# Altium PCB usb_serial_daughter.PcbDoc
Units mm, origin at the board's own origin, x right, y up, seen from the top; angles counter-clockwise.
Board outline 16 x 25 mm, 4 copper layers (Top Copper, Plane Layer 1 (GND), Plane Layer 2 (VCC), Bottom Copper), stack 1.57 mm thick; 10 components, 19 nets, 56 pads, 8 vias.
Unrouted connection lines stored in the file: 6.
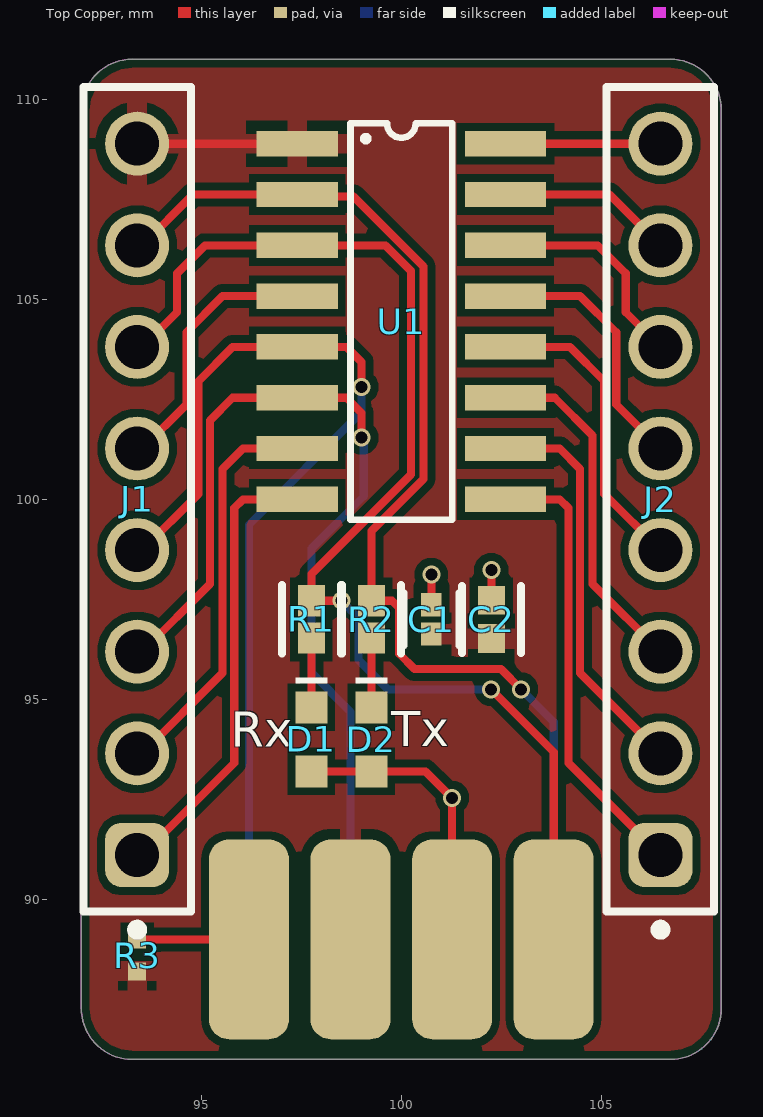
[diagram p0: Top Copper view]
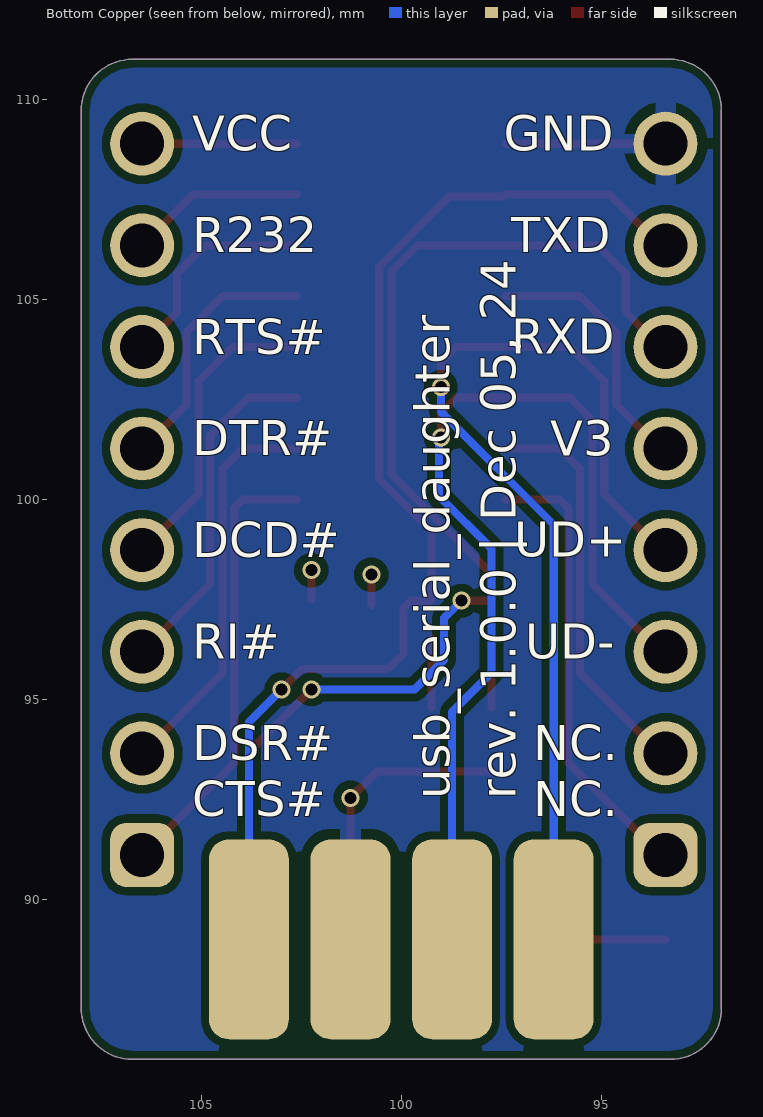
[diagram p1: Bottom Copper view, seen from below]
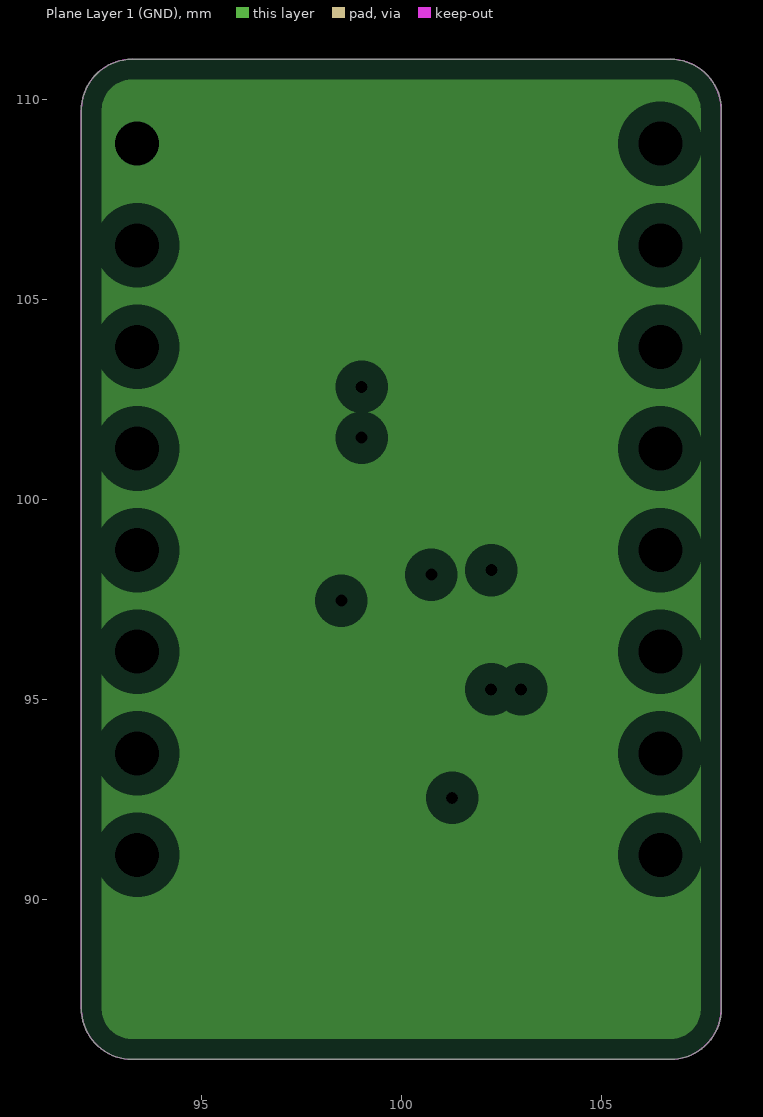
[diagram p2: Plane Layer 1 (GND), clearances drawn from the general rule]
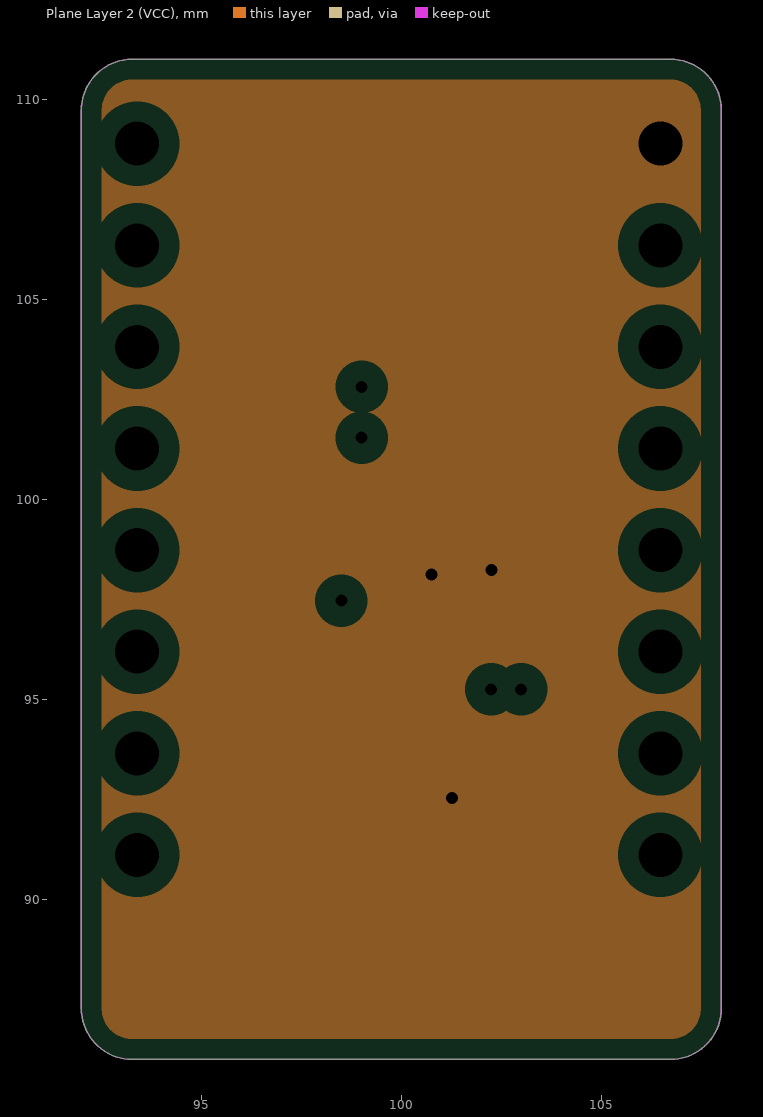
[diagram p3: Plane Layer 2 (VCC), clearances drawn from the general rule]
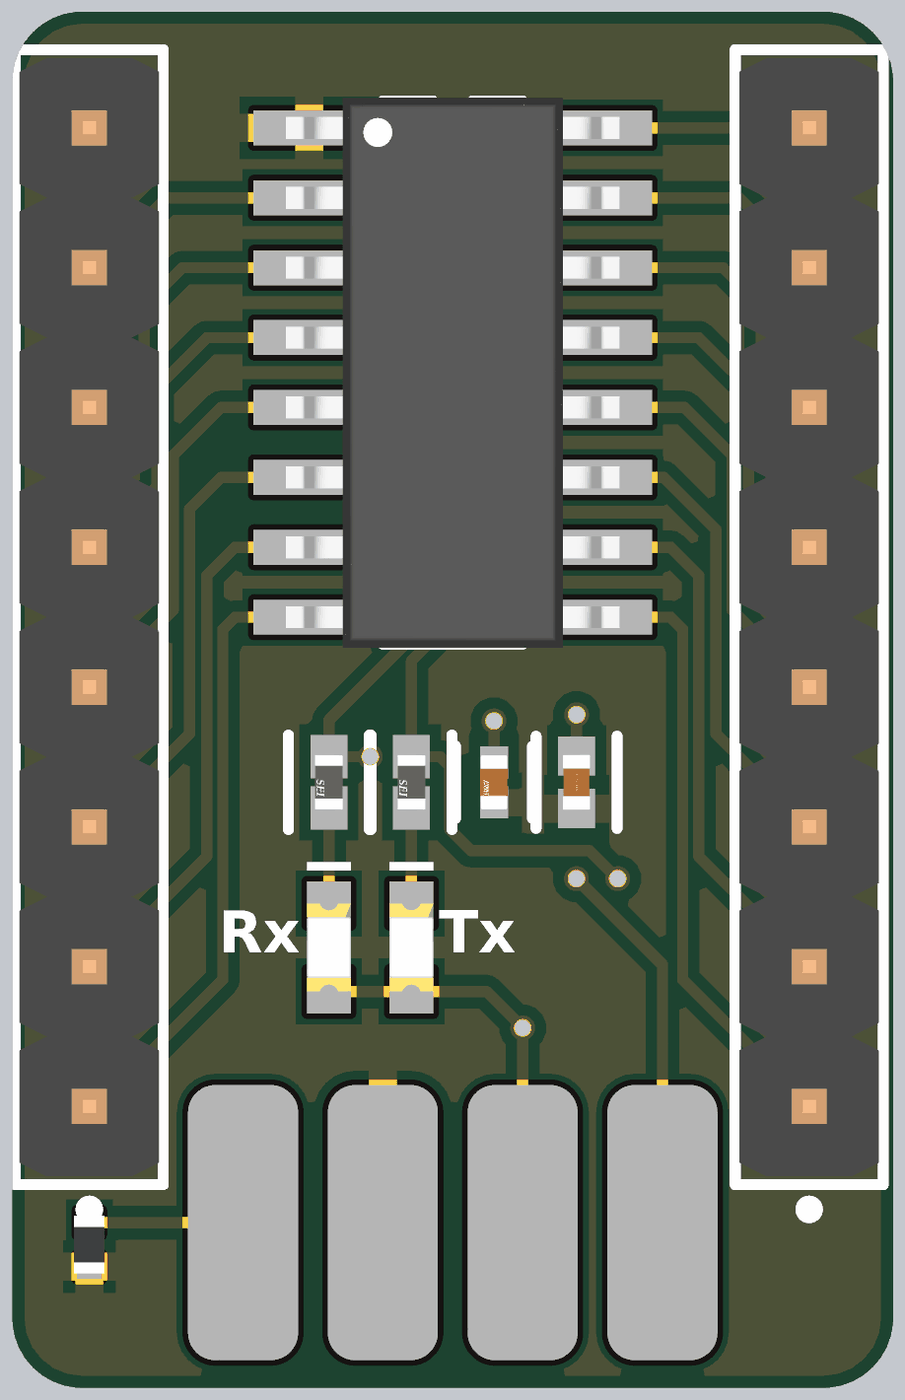
[diagram p4: 3D render of the assembled board from above, using the file's embedded part models]

## Layer stack, top to bottom
Top Mask: solder mask 0.015, Solder Resist, Dk 3.8
Top Copper: signal copper 0.035
Dielectric 1: prepreg 0.2, 7628, Dk 4.6
Plane Layer 1 (GND): plane copper 0.0175, net GND
Core: core 1.065, FR-4, Dk 4.5
Plane Layer 2 (VCC): plane copper 0.0175, net VCC
Dielectric 2: prepreg 0.2, 7628, Dk 4.6
Bottom Copper: signal copper 0.035
Bottom Mask: solder mask 0.015, Solder Resist, Dk 3.8

## Board outline
92,87.27 92,109.73 cw(c93.27,109.73) 93.27,111 106.73,111 cw(c106.73,109.73) 108,109.73 108,87.27 cw(c106.73,87.27) 106.73,86 93.27,86 cw(c93.27,87.27)

## Design rules (kind name [scope] priority, off if disabled: settings)
BoardOutlineClearance [All] p1: gap=0.2 ignorepadtopadclearanceinfootprint=FALSE except(0.4: Arc-SplitBarrior Arc-SplitContinuation Track-SplitBarrior Track-SplitContinuation SMDPad-SplitBarrior SMDPad-SplitContinuation THPad-SplitBarrior THPad-SplitContinuation Via-SplitBarrior Via-SplitContinuation Fill-SplitBarrior Fill-SplitContinuation Poly-SplitBarrior Poly-SplitContinuation Region-SplitBarrior Region-SplitContinuation Text-SplitBarrior Text-SplitContinuation)
Clearance [All] p1: gap=0.2 ignorepadtopadclearanceinfootprint=FALSE except(0.089: Arc-Arc Arc-Track Arc-SMDPad Track-Track Track-SMDPad SMDPad-SMDPad; 0.127: Arc-Via Track-Via SMDPad-Via THPad-Via Via-Via; 0.254: Arc-Text Track-Text SMDPad-Text THPad-Text Via-Text Fill-Text Poly-Text Region-Text Text-Text)
HoleSize [All] p1: absolutevalues=TRUE maxlimit=6.3 minlimit=0.2 maxpercent=80.000 minpercent=20.000
MinimumAnnularRing [All] p1: minimumring=0.076
MinimumSolderMaskSliver [All] p1: minsoldermaskwidth=0.1
PlaneClearance [All] p1: clearance=0.508
PlaneConnect [All] p1: planeconnectstyle=Relief reliefexpansion=0.508 reliefentries=4 reliefconductorwidth=0.254 reliefairgap=0.254
PolygonConnect PolygonConnect_1 [All] p1: thpad.connectstyle=Relief thpad.reliefconductorwidth=0.508 thpad.reliefentries=4 thpad.polygonreliefangle="90 Angle" thpad.airgapwidth=0.254 smdpad.connectstyle=Relief smdpad.reliefconductorwidth=0.508 smdpad.reliefentries=4 smdpad.polygonreliefangle="90 Angle" smdpad.airgapwidth=0.254 via.connectstyle=Direct via.reliefconductorwidth=0.508 via.reliefentries=4 via.polygonreliefangle="90 Angle" via.airgapwidth=0.254
RoutingCorners [All] p1: cornerstyle=Round minsetback=2.54 maxsetback=2.54
RoutingVias [All] p1: holewidth=0.5 width=1 viastyle="Through Hole" minholewidth=0.2 minwidth=0.45 maxholewidth=1 maxwidth=2
SilkToSilkClearance [All] p1: silktosilkclearance=0.1
SilkToSolderMaskClearance [IsPad] p1: minsilkscreentomaskgap=0.1 clearancetoexposedcopper=TRUE
SolderMaskExpansion [All] p1: expansion=0.102 istentingtop=FALSE
Width [All] p1: maxlimit=2.54 minlimit=0.089 preferedwidth=0.381
23 further rules are at their usual default settings.

## Components (designator, comment, footprint, x,y, rotation, side; value= is the part's Value field where it differs from the comment)
C1 "0402ZD104KAT2A" FP-0402-L_1_0_1-W_0_5_0_1-IPC_C 100.75,97 r270 top
C2 "EMK105BJ105KV-F" FP-0402-L_1_0_0_05-W_0_5-IPC_A 102.25,97 r270 top
D1 "150060VS75000" WL-SMCW_0603_150060xx75000 97.75,94 r270 top
D2 "150060RS75000" WL-SMCW_0603_150060xx75000 99.25,94 r270 top
J1 "61300811121" 61300811121 93.396,100 r90 top locked
J2 "61300811121" 61300811121 106.477,100 r90 top locked
R1 "RMCF0402FT1K00" FP-RMCF0402-IPC_A 97.75,97 r270 top
R2 "RMCF0402FT1K00" FP-RMCF0402-IPC_A 99.25,97 r270 top
R3 "ERJ2GE0R00X" RESC1005X40X25LL05T05 93.396,88.6 r90 top locked
U1 "CH340C" CH340C 100,100 r0 top locked

## Footprints (in the part's own frame and the unit in brackets; to place one, negate y for a bottom-side part, rotate by r counter-clockwise, add the part's x,y. Pads: shape width x height; smd on the part's side, far side on the other; paste and mask are expansions set on the pad)
61300811121 [mm] "Pin Header, pitch 2.54 mm, THT, Vertical, single row, 8p"
  rrect50% 1.6x1.6 hole 1.1: 1(-8.89,0)
  round 1.6 hole 1.1: 2(-6.35,0) 3(-3.81,0) 4(-1.27,0) 5(1.27,0) 6(3.81,0) 7(6.35,0) 8(8.89,0)
  silkscreen extent -10.88,-1.35 10.31,1.35, body extent -10.16,-1.27 10.16,1.27, height 8.57
CH340C [mil]
  rect 80x25 smd: 1(-102.5,350) 2(-102.5,300) 3(-102.5,250) 4(-102.5,200) 5(-102.5,150) 6(-102.5,100) 7(-102.5,50) 8(-102.5,0) 8(-102.5,0) 9(102.5,0) 9(102.5,0) 10(102.5,50) 11(102.5,100) 12(102.5,150) 13(102.5,200) 14(102.5,250) 15(102.5,300) 16(102.5,350)
  silkscreen extent -50,-20 50,370, body extent -119,-22 119,372, height 65
FP-0402-L_1_0_0_05-W_0_5-IPC_A [mm]
  rect 0.715x0.672 smd paste+0 mask+0: 1(-0.479,0) 2(0.479,0)
  silkscreen extent -0.84,-0.74 0.84,0.74, body extent -1.04,-0.54 1.04,0.54, height 0.25
FP-0402-L_1_0_1-W_0_5_0_1-IPC_C [mm]
  rect 0.581x0.512 smd paste+0 mask+0: 1(-0.366,0) 2(0.366,0)
  silkscreen extent -0.66,-0.7 0.66,0.7, body extent -0.76,-0.4 0.76,0.4, height 0.25
FP-RMCF0402-IPC_A [mm]
  rect 0.781x0.672 smd paste+0 mask+0: 1(-0.466,0) 2(0.466,0)
  silkscreen extent -0.86,-0.74 0.86,0.74, body extent -1.06,-0.54 1.06,0.54, height 0.25
RESC1005X40X25LL05T05 [mm] "Chip Resistor, 2-Leads, Body 1.05x0.55mm, IPC High Density"
  rect 0.45x0.45 smd: 1(-0.4,0) 2(0.4,0)
  body extent -0.53,-0.28 0.53,0.28, height 0.4
WL-SMCW_0603_150060xx75000 [mm] "SMD Mono-color Chip LED, body 1.60 x 0.80 mm"
  rect 0.8x0.8 smd: 1(-0.8,0) 2(0.8,0)
  silkscreen extent -1.55,-0.4 -1.4,0.4, body extent -0.8,-0.4 0.8,0.4, height 0.7

## Part data
C1: library part CMP-2008-02878-3, "General Purpose Ceramic Capacitor, 0402, 100nF, 10%, X5R, 15%, 10V", Capacitance=100nF, Case Code (Imperial)=0402, Case Code (Metric)=1005, Dielectric=X5R, Insulation Resistance=100GR, Max Operating Temperature=85°C, Min Operating Temperature=-55°C, Package Quantity=1, Tolerance=10%, Voltage=10V, Case/Package=0402, Construction=Flat, Contact Plating=Tin, Depth=0.5mm, Dissipation Factor=5%, Height=0.56mm, Lead Free="Lead Free", Length=1mm, Mount="Surface Mount", Packaging="Tape and Reel", Radiation Hardening=No, REACH SVHC="No SVHC", RoHS Compliant=Yes, Series=-, Termination=SMD/SMT, Thickness=0.022inch, Voltage Rating=10V, Voltage Rating (DC)=10V, Width=0.02inch
C2: library part CMP-14477-000104-2, "None", Capacitance=1uF, Case Code (Imperial)=0402, Case Code (Metric)=1005, Dielectric=X5R, Max Operating Temperature=85°C, Min Operating Temperature=-55°C, Package Quantity=1, Tolerance=10%, Voltage Rating=16V, Case/Package=0402, Construction=Flat, Depth=0.5mm, Halogen Free="Halogen Free", Height=0.5mm, Length=1mm, Mount="Surface Mount", Number of Pins=2, Packaging="Tape and Reel", Radiation Hardening=No, RoHS Compliant=Yes, Series=M, Termination=SMD/SMT, Thickness=0.022inch, Voltage Rating (DC)=16V, Width=0.02inch
D1: library part CMP-1426-00006-7, "WURTH ELEKTRONIK - 150060VS75000 - LED, Green, SMD, 0603, 30 mA, 2 V, 570 nm", Case Code (Imperial)=0603, Case Code (Metric)=1608, Color=Green, Forward Current=100mA, Forward Voltage=2V, Max Junction Temperature (Tj)=95°C, Max Operating Temperature=85°C, Max Reverse Voltage (DC)=5V, Min Operating Temperature=-40°C, Power Dissipation=72mW, Test Current=20mA, Case/Package=0603, Dominant Wavelength=570nm, Height=700µm, Length=1.6mm, Lens Style="Clear, Rectangular", Luminous Intensity=40mcd, Mount="Surface Mount", Number of Pins=2, Packaging="Tape and Reel", Peak Wavelength=572nm, REACH SVHC=Unknown, Reverse Voltage=5V, RoHS=Compliant, Viewing Angle=140°, Wavelength=570nm, Width=800µm
D2: library part CMP-1426-00001-4, "LED Low-Power Uni-Color Red 630nm 2V 2-Pin Chip 0603(1608Metric) T/R", Case Code (Imperial)=0603, Case Code (Metric)=1608, Color=Red, Forward Current=100mA, Forward Voltage=2V, Max Junction Temperature (Tj)=95°C, Max Operating Temperature=85°C, Max Reverse Voltage (DC)=5V, Min Operating Temperature=-40°C, Power Dissipation=72mW, Test Current=20mA, Case/Package=0603, Dominant Wavelength=625nm, Height=700µm, Length=1.6mm, Lens Style="Clear, Rectangular", Luminous Intensity=250mcd, Mount="Surface Mount", Packaging="Tape and Reel", Peak Wavelength=630nm, REACH SVHC=Unknown, Reverse Voltage=5V, RoHS=Compliant, Viewing Angle=140°, Wavelength=625nm, Width=800µm
J1 J2: library part CMP-1502-01076-3, Color=Black, Contact Resistance=20mΩ, Current Rating=3A, Max Operating Temperature=105°C, Min Operating Temperature=-40°C, Operating Supply Voltage=250V, Connector Type="Male Pin", Contact Material=Copper, Contact Mating Length=5.9944mm, Contact Plating=Gold, Gender=Male, Height=8.54mm, Lead Pitch=2.54mm, Mount="Through Hole", NexarPartId=32855533, Number of Contacts=8, Number of Pins=8, Number of Positions=8, Number of Rows=1, Orientation=Vertical, Packaging=Bulk, Pitch=2.54mm, REACH SVHC=Unknown, RoHS=Compliant, Termination=Solder, Voltage Rating=250V
R1 R2: library part CMP-26527-000026-1, "1kΩ ±1% 0.063W 0402 Thick Film Chip Resistor AEC-Q200 compliant", Case Code (Imperial)=0402, Case Code (Metric)=1005, Max Operating Temperature=155°C, Max Power Dissipation=63mW, Min Operating Temperature=-55°C, Resistance=1kR, Resistor Type="Thick Film", Temperature Coefficient=100ppm/°C, Tolerance=1%, Case/Package=0402, Construction=Rectangular, Contact Plating=Tin, Depth=0.5mm, Features="Automotive AEC-Q200", Height=0.016inch, Lead Free="Lead Free", Length=1mm, Military Standard=Not, Mount="Surface Mount", Number of Terminations=2, Packaging="Tape and Reel", Power Rating=63mW, Radiation Hardening=No, RoHS Compliant=Yes, Series=RMCF, Size Code=0402, Width=0.02inch
R3: library part CMP-2000-07451-1, "Chip Resistor, 0 Ohm, 0.1 W, -55 to 155 degC, 0402 (1005 Metric), RoHS, Tape and Reel", Case Code (Imperial)=0402, Case Code (Metric)=1005, Manufacturer=Panasonic, Max Operating Temperature=155degC, Max Power Dissipation=100mW, Min Operating Temperature=-55degC, Package Description="2-Pin Surface Mount Device, Body 1 x 0.5 mm", Package Quantity=1, Package Reference=402, Resistance=0mOhm, Temperature Coefficient=600ppm/��C, Tolerance=5%, Voltage Rating=50V, Case/Package=0402, Composition=ThickFilm, Contact Plating=Tin, Datasheet URL=https://industrial.panasonic.com/cdbs/www-data/pdf/RDA0000/AOA0000C301.pdf, Datasheet Version=03/2015, Depth=0.5mm, Height=0.35mm, Lead Free=LeadFree, Length=1mm, Manufacturer URL=http://www.panasonic.com/, Military Standard=Not, Mount=SurfaceMount, Mounting Technology=SurfaceMount, Number of Terminations=2, Packaging=TapeandReel, Power Rating=100mW, Radiation Hardening=No, REACH SVHC=NoSVHC, RoHSCompliant=True, Termination=SMD/SMT, Voltage Rating (DC)=50V, Width=0.02inch
U1: "USB to Serial CH340 IC"

## Free pads (board coordinates)
  rrect50% 2x5 smd: 1(96.19,89) 3(98.73,89) 5(101.27,89) 7(103.81,89)
  rrect50% 2x5 smd far side: 2(96.19,89) 4(98.73,89) 6(101.27,89) 8(103.81,89)

## Via types
v1: diameter 0.45, hole 0.3, Top Copper to Bottom Copper, tented both sides, 8 vias

## Nets (pads, with @x,y where several pads share a name; then routed paths per layer and width w, separated by ;. In a path a pad name is that pad's centre, name@x,y a point inside that pad or via, vN(x,y) a via of type N, cw(c..) or ccw(c..) an arc to the next point about the centre after c; other vN are vias at no path point)
GND: C1.2 C2.2 J1.8 pad.3 pad.6 R3.1 U1.1 | length 3.9
  Top Copper w0.203: J1.8@93.523,108.89 U1.1
NetD1_1: D1.1 R1.2 | length 1.7
  Top Copper w0.203: D1.1 R1.2
NetD2_1: D2.1 R2.2 | length 1.7
  Top Copper w0.203: D2.1 R2.2
NetJ1_1: J1.1 U1.8 | length 11.3
  Top Copper w0.203: J1.1@93.523,91.11 95.823,93.41 95.823,99.785 96.038,100 U1.8@97.397,100
NetJ1_2: J1.2 U1.7 | length 10
  Top Copper w0.203: J1.2@93.523,93.65 95.531,95.658 95.531,100.763 96.038,101.27 U1.7
NetJ1_5: J1.5 U1.4 | length 6.5
  Top Copper w0.203: J1.5@93.523,101.27 94.628,102.375 94.628,104.178 95.53,105.08 U1.4
NetJ2_1: J2.1 U1.9 | length 11.3
  Top Copper w0.203: U1.9@102.604,100 103.962,100 104.177,99.785 104.177,93.41 J2.1
NetJ2_2: J2.2 U1.10 | length 10
  Top Copper w0.203: U1.10 103.962,101.27 104.469,100.763 104.469,95.658 J2.2
NetJ2_3: J2.3 U1.11 | length 8.7
  Top Copper w0.203: U1.11 103.835,102.54 104.781,101.594 104.781,97.886 J2.3
NetJ2_4: J2.4 U1.12 | length 7.6
  Top Copper w0.203: U1.12 104.216,103.81 105.074,102.952 105.074,100.133 J2.4
NetJ2_5: J2.5 U1.13 | length 6.5
  Top Copper w0.203: U1.13 104.47,105.08 105.372,104.178 105.372,102.375 J2.5
NetJ2_6: J2.6 U1.14 | length 5.5
  Top Copper w0.203: U1.14 104.91,106.35 105.61,105.65 105.61,104.677 J2.6
NetJ2_7: J2.7 U1.15 | length 4.4
  Top Copper w0.203: U1.15 105.207,107.62 J2.7
RXD: J1.6 pad.7 R1.1 U1.3 | length 30.8
  Top Copper w0.203: J1.6@93.523,103.81 94.39,104.677 94.39,105.65 95.09,106.35 U1.3 99.603,106.35 100.24,105.713 100.24,100.621 97.75,98.131 R1.1 v1(98.5,97.466) ; v1(102.247,95.25) 103.81,93.687 pad.7
  Bottom Copper w0.203: v1(98.5,97.466) 98.933,97.033 98.933,95.984 99.667,95.25 v1(102.247,95.25)
TXD: J1.7 pad.8 R2.1 U1.2 | length 29.1
  Top Copper w0.203: J1.7@93.523,106.35 94.793,107.62 U1.2 97.448,107.569 98.806,107.569 100.551,105.824 100.551,100.505 99.25,99.205 R2.1 99.765,97.466 99.949,97.282 99.949,96.139 100.33,95.758 102.489,95.758 v1(102.997,95.25)
  Bottom Copper w0.203: v1(102.997,95.25) 103.81,94.437 pad.8
USB_D+: J1.4 pad.2 U1.5 | length 25
  Top Copper w0.203: J1.4@93.523,98.73 94.926,100.133 94.926,102.952 95.784,103.81 U1.5 98.628,103.81 99.009,103.429 v1(99.009,102.81)
  Bottom Copper w0.203: pad.2 96.19,99.365 99.009,102.184 v1(99.009,102.81)
USB_D-: J1.3 pad.4 U1.6 | length 24.8
  Top Copper w0.203: J1.3@93.523,96.19 95.219,97.886 95.219,101.975 95.784,102.54 U1.6 98.628,102.54 99.009,102.159 v1(99.009,101.54)
  Bottom Copper w0.203: pad.4 98.73,94.687 97.75,95.667 97.75,98.766 99.06,100.076 99.06,101.489 v1(99.009,101.54)
USB_ID: pad.1 R3.2 | length 2.8
  Top Copper w0.203: R3.2 pad.1
VCC: C1.1 C2.1 D1.2 D2.2 J2.8 pad.5 U1.16 | length 12.7
  Top Copper w0.203: D1.2 D2.2 100.607,93.2 v1(101.27,92.537) pad.5 ; C1.1 v1(100.75,98.116) ; C2.1 v1(102.25,98.229) ; U1.16 J2.8

## Polygon pours and split planes (outlines as drawn)
GND on Bottom Copper "GND_L04_P001" (solid, pour order 1): 92,87.27 92,109.73 cw(c93.27,109.73) 93.27,111 106.73,111 cw(c106.73,109.73) 108,109.73 108,87.27 cw(c106.73,87.27) 106.73,86 93.27,86 cw(c93.27,87.27)
GND on Top Copper "GND_L01_P000" (solid, pour order 0): 92,87.27 92,109.73 cw(c93.27,109.73) 93.27,111 106.73,111 cw(c106.73,109.73) 108,109.73 108,87.27 cw(c106.73,87.27) 106.73,86 93.27,86 cw(c93.27,87.27)
VCC on Plane Layer 2 (VCC) (split plane): 106.849,110.482 106.965,110.455 107.076,110.409 107.178,110.346 107.269,110.269 107.346,110.178 107.409,110.076 107.455,109.965 107.482,109.849 107.491,109.743 107.49,109.73 107.49,87.27 107.491,87.257 107.482,87.151 107.455,87.035 107.409,86.924 107.346,86.822 107.269,86.731 107.178,86.654 107.076,86.591 106.965,86.545 106.849,86.518 106.743,86.509 106.73,86.51 93.27,86.51 93.257,86.509 93.151,86.518 93.035,86.545 92.924,86.591 92.822,86.654 92.731,86.731 92.654,86.822 92.591,86.924 92.545,87.035 92.518,87.151 92.509,87.257 92.51,87.27 92.51,109.73 92.509,109.743 92.518,109.849 92.545,109.965 92.591,110.076 92.654,110.178 92.731,110.269 92.822,110.346 92.924,110.409 93.035,110.455 93.151,110.482 93.257,110.491 93.27,110.49 106.73,110.49 106.743,110.491
GND on Plane Layer 1 (GND) (split plane): 106.849,110.482 106.965,110.455 107.076,110.409 107.178,110.346 107.269,110.269 107.346,110.178 107.409,110.076 107.455,109.965 107.482,109.849 107.491,109.743 107.49,109.73 107.49,87.27 107.491,87.257 107.482,87.151 107.455,87.035 107.409,86.924 107.346,86.822 107.269,86.731 107.178,86.654 107.076,86.591 106.965,86.545 106.849,86.518 106.743,86.509 106.73,86.51 93.27,86.51 93.257,86.509 93.151,86.518 93.035,86.545 92.924,86.591 92.822,86.654 92.731,86.731 92.654,86.822 92.591,86.924 92.545,87.035 92.518,87.151 92.509,87.257 92.51,87.27 92.51,109.73 92.509,109.743 92.518,109.849 92.545,109.965 92.591,110.076 92.654,110.178 92.731,110.269 92.822,110.346 92.924,110.409 93.035,110.455 93.151,110.482 93.257,110.491 93.27,110.49 106.73,110.49 106.743,110.491

## Keep-outs
Keep-Out Layer:
  the board outline again, w0.025

## Silkscreen, mask and mechanical layers (free items; w line width, h text height)
Top Overlay:
  text "Tx" at 99.75,93.537 h1.5
  text "Rx" at 95.74,93.532 h1.5
Bottom Overlay:
  text "GND" at 97.445,108.425 h1.5
  text "VCC" at 105.227,108.425 h1.5
  text "TXD" at 97.257,105.888 h1.5
  text "R232" at 105.227,105.886 h1.5
  text "RXD" at 97.249,103.348 h1.5
  text "RTS#" at 105.227,103.345 h1.5
  text "V3" at 96.271,100.806 h1.5
  text "DTR#" at 105.227,100.808 h1.5
  text "UD+" at 97.176,98.271 h1.5
  text "DCD#" at 105.227,98.265 h1.5
  text "UD-" at 96.902,95.731 h1.5
  text "RI#" at 105.227,95.722 h1.5
  text "NC." at 96.703,93.185 h1.5
  text "DSR#" at 105.227,93.185 h1.5
  text "rev. 1.0.0 | Dec 05, 24" at 96.854,92.5 h1.5 r270
  text "usb_serial_daughter" at 98.5,92.5 h1.5 r270
  text "NC." at 96.703,91.785 h1.5
  text "CTS#" at 105.227,91.785 h1.5
Mechanical 1:
  lines w0.025: 92,87.27 ccw(c93.27,87.27) 93.27,86 106.73,86 ccw(c106.73,87.27) 108,87.27 108,109.73 ccw(c106.73,109.73) 106.73,111 100,111 93.27,111 ccw(c93.27,109.73) 92,109.73 92,87.27